# Altium PCB BeagleBone_Black_RevB4_V2.PcbDoc (part 3 of 3)
Units mm, origin at the board's own origin, x right, y up, seen from the top; angles counter-clockwise.
Board outline 100 x 100 mm, 2 copper layers (Top Layer, Bottom Layer); 274 components, 245 nets, 1313 pads, 251 vias.
Unrouted connection lines stored in the file: 891.
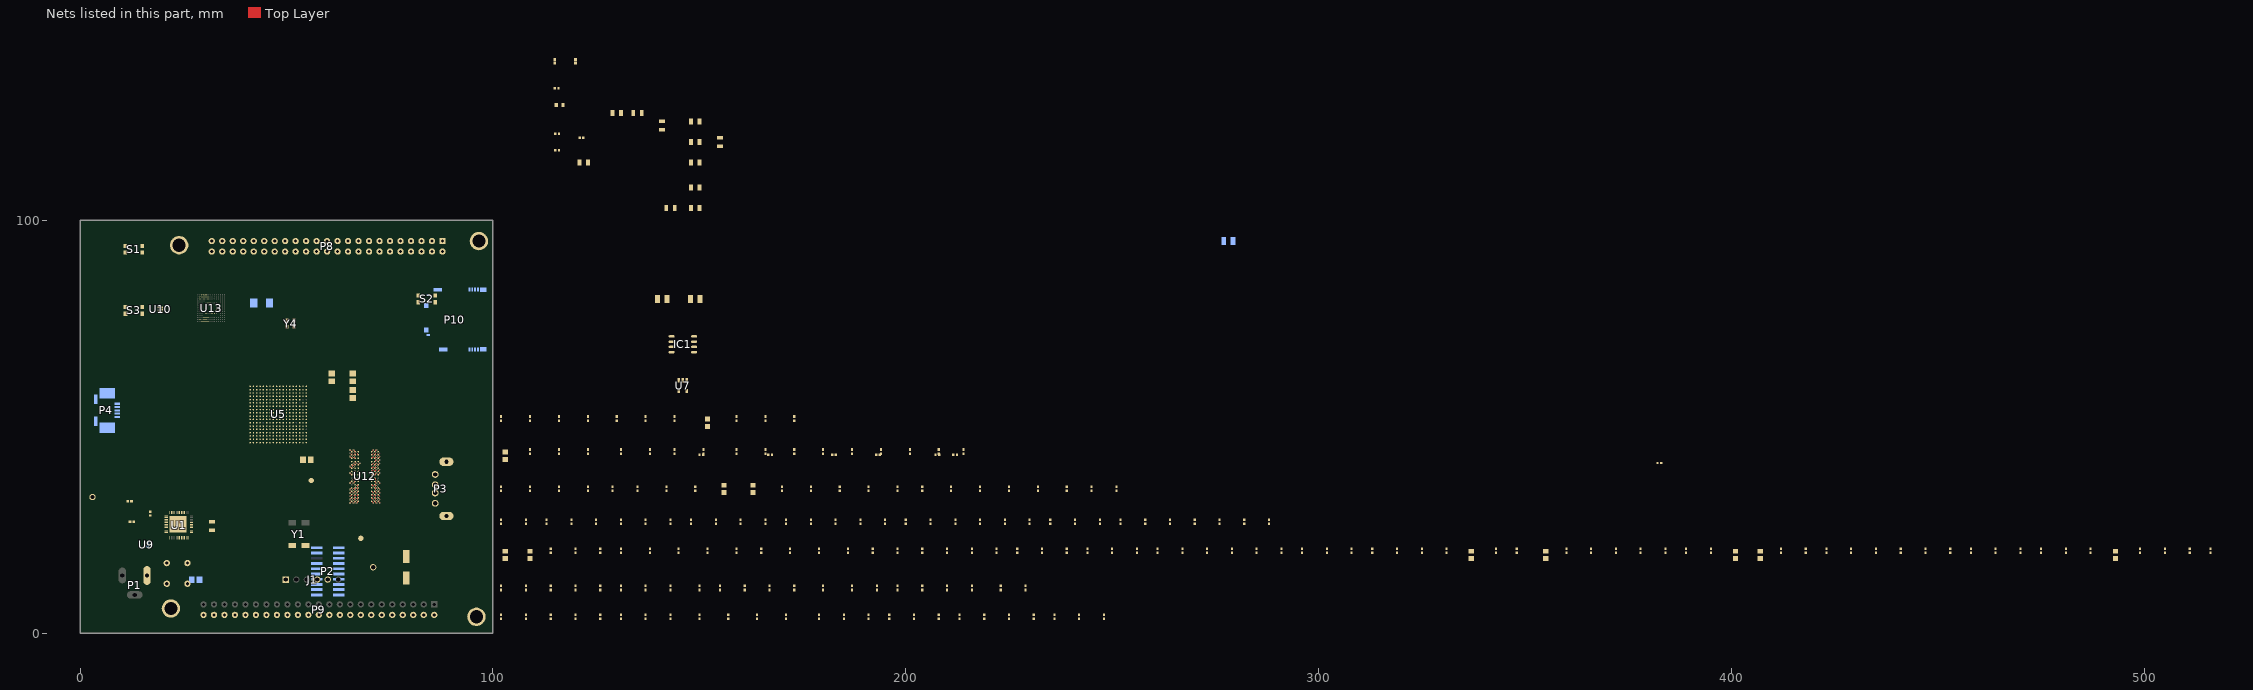
[diagram p2: the nets of this part, all layers, seen from the top]

## Part data (continued)
Y2: library part CRYS_24MHz_SCC, "CRYSTAL 24.000MHZ 18PF SMD", ESR (Equivalent Series Resistance)="50 Ohm", Frequency Stability=±30ppm, Load Capacitance=18pF, Manufacturer="TXC CORPORATION", Manufacturer Part Number=7A-24.000MAAJ-T, Operating Mode=Fundamental, Operating Temperature="-20°C ~ 70°C", Package / Case=2-SMD, Ratings=-, Supplier Part Number 1=887-1090-6-ND, Category="Crystals and Oscillators", ComponentLink1Description=http://www.txccrystal.com/images/pdf/7a.pdf, ComponentLink1URL=http://www.txccrystal.com/images/pdf/7a.pdf, Frequency=24MHz, Frequency Tolerance=±30ppm, Height="0.053\" (1.35mm)", Mounting Type="Surface Mount", Packaging=Digi-Reel®, Pricing 1="1=0.79, 10=0.658, 50=0.59, 100=0.525, 500=0.5 (USD)", RoHS="RoHS Compliant", Size / Dimension="0.197\" L x 0.126\" W (5.00mm x 3.20mm)", Stock 1=2524, Supplier 1=Digi-Key, Type="MHz Crystal"
Y4: library part ASDMB, Current - Supply (Disable) (Max)=15µA, Current - Supply (Max)=16mA, Frequency Stability=±50ppm, Manufacturer="Abracon Corporation", Manufacturer Part Number=ASDMB-24.576MHZ-LC-T, Operating Temperature="-40°C ~ 85°C", Package / Case="4-SMD, No Lead (DFN, LCC)", Ratings=-, Supplier Part Number 1=535-11729-6-ND, Voltage - Supply="1.8 V ~ 3.3 V", Category="Crystals and Oscillators", ComponentLink1Description=http://www.abracon.com/Oscillators/ASDMB.pdf, ComponentLink1URL=http://www.abracon.com/Oscillators/ASDMB.pdf, Frequency=24.576MHz, Function="Standby (Power Down)", Height="0.035\" (0.90mm)", Mounting Type="Surface Mount", Output=CMOS, Packaging=Digi-Reel®, Pricing 1="1=1.69, 10=1.463, 50=1.2826, 100=1.0125, 500=0.855 (USD)", RoHS="RoHS Compliant", Size / Dimension="0.098\" L x 0.079\" W (2.50mm x 2.00mm)", Stock 1=0, Supplier 1=Digi-Key, Type="MEMS (Silicon)"

## Via types
v1: diameter 0.457, hole 0.203, Top Layer to Bottom Layer, tented both sides, 251 vias

## Nets (pads, with @x,y where several pads share a name; then routed paths per layer and width w, separated by ;. In a path a pad name is that pad's centre, name@x,y a point inside that pad or via, vN(x,y) a via of type N, cw(c..) or ccw(c..) an arc to the next point about the centre after c; other vN are vias at no path point)
12M_LOOP: 
12MHZ: R21.2
AIN0: C1.2 C2.2 C3.2 C4.2 C5.1 C6.1 C7.2 C8.2 C9.1 C10.2 C11.1 C12.2 C13.1 C14.1 C15.1 C16.2 C18.2 C24.2 C27.2 C28.2 C29.2 C30.2 C31.2 C32.2 C33.2 C34.2 C35.2 C36.2 C37.2 C38.2 C39.1 C40.1 C41.2 C42.2 C43.2 C44.2 C45.2 C46.2 C47.2 C48.2 C49.2 C50.2 C51.2 C52.2 C53.2 C54.2 C55.1 C56.1 C57.1 C58.2 C59.2 C60.1 C61.1 C62.1 C63.2 C64.2 C65.2 C66.2 C67.2 C68.1 C69.1 C70.1 C71.1 C72.1 C73.1 C74.1 C75.1 C76.1 C77.2 C78.2 C79.2 C80.2 C81.2 C82.2 C83.2 C84.2 C85.2 C86.2 C87.2 C88.2 C89.2 C90.2 C91.2 C92.2 C93.2 C94.2 C95.1 C96.1 C97.2 C98.2 C99.2 C100.2 C101.2 C102.2 C103.2 C104.2 C105.2 C106.2 C107.2 C108.2 C109.2 C110.2 C111.2 C112.2 C113.2 C114.2 C115.2 C116.2 C117.2 C118.1 C119.2 C120.2 C121.2 C122.1 C123.2 C124.2 C125.2 C126.1 C127.2 C128.2 C129.2 C130.2 C152.2 C153.2 C154.2 C155.1 C158.2 C159.2 FB3.1 FB3.2 IC1.5 IC1.6 IC1.7 IC1.8 J1.1 P2.4 P2.8 P2.10 P2.12 P2.16 P2.20 P3.4 P4.5 P8.1 P8.2 P9.2 P9.30 P9.34 P9.38 P9.40 P9.44 P9.46 P10.6 P10.9 R9.2 R10.1 R22.1 R25.2 R49.1 R53.2 R54.1 R80.2 R81.2 R82.2 R83.2 R84.2 R85.2 R86.2 R87.2 R88.2 R89.2 R90.2 R91.2 R92.2 R93.2 R94.2 R95.2 R96.1 R99.1 R100.2 R164.2 R165.2 S1.1 S1.3 S2.2 S2.4 S3.1 S3.3 TP1.1 TP8.1 U1.30 U1.41 U1.49 U5.A1 U5.A7 U5.A8 U5.A9 U5.A18 U5.B6 U5.B7 U5.B13 U5.C7 U5.C8 U5.D12 U5.E8 U5.F8 U5.G8 U5.G9 U5.G11 U5.G12 U5.H6 U5.H7 U5.H8 U5.H9 U5.H10 U5.H12 U5.J6 U5.J7 U5.J8 U5.J9 U5.J10 U5.J11 U5.K7 U5.K9 U5.K10 U5.K11 U5.L10 U5.L11 U5.L12 U5.L13 U5.M6 U5.M7 U5.M8 U5.M9 U5.M10 U5.M12 U5.M14 U5.N7 U5.N10 U5.N11 U5.N14 U5.V1 U5.V18 U7.2 U9.4 U10.4 U12.A9 U12.B1 U12.B3 U12.B9 U12.D1 U12.D8 U12.E1 U12.E2 U12.E8 U12.F9 U12.G1 U12.G8 U12.G9 U12.J2 U12.J8 U12.M1 U12.M9 U12.P1 U12.P9 U12.T1 U12.T9 U13.C4 U13.E7 U13.G5 U13.H10 U13.K8 U13.N2 U13.N5 U13.P4 U13.P6 Y4.2
  other v1: 65.4,31.599 72.6,31.599 65.4,33.199 72.6,33.199 65.4,34.8 72.6,34.8 66.2,37.2 71.8,37.2 71.8,39.6 72.6,39.6 66.2,40.4 66.2,41.2 71.8,41.2 71.8,42.001 65.4,43.601 67,43.601 72.6,43.601
AIN5: P9.36 U5.B8
AIN7: R163.2 R164.1 U5.C9
B_UART0_RX: J1.4 R165.1
B_UART0_TX: J1.5
CAP_VBB_MPU: C91.1 U5.C10
CAP_VDD_SRAM_CORE: C89.1 U5.D9
CAP_VDD_SRAM_MPU: C90.1 U5.D11
CLKOUT2: P2.18 P9.42 R2.1 R3.1 R19.2 R20.1 R50.1 R51.1 U1.27 U1.28 U5.C16 U5.C17 U7.1 U7.3
CLKOUT_SRC: R19.1 U5.D14
DDR_A0: U5.F3 U12.N3
  other v1: 67,34
DDR_A1: U5.H1 U12.P7
  other v1: 71,33.199
DDR_A2: U5.E4 U12.P3
  other v1: 67,33.199
DDR_A3: U5.C3 U12.N2
  other v1: 66.2,34
DDR_A4: U5.C2 U12.P8
  other v1: 71.8,33.199
DDR_A5: U5.B1 U12.P2
  other v1: 66.2,33.199
DDR_A6: U5.D5 U12.R8
  other v1: 71.8,32.399
DDR_A7: U5.E2 U12.R2
  other v1: 66.2,32.399
DDR_A8: U5.D4 U12.T8
  other v1: 71.8,31.599
DDR_A9: U5.C1 U12.R3
  other v1: 67,32.399
DDR_A10: U5.F4 U12.L7
  other v1: 71,35.6
DDR_A11: U5.F2 U12.R7
  other v1: 71,32.399
DDR_A12: U5.E3 U12.N7
  other v1: 71,34
DDR_A13: U5.H3 U12.T3
  other v1: 67,31.599
DDR_A14: U5.H4 U12.T7
  other v1: 71,31.599
DDR_A15: U5.D3 U12.M7
DDR_BA0: U5.C4 U12.M2
  other v1: 66.2,34.8
DDR_BA1: U5.E1 U12.N8
  other v1: 71.8,34
DDR_BA2: U5.B3 U12.M3
  other v1: 67,34.8
DDR_CASn: U5.F1 U12.K3
DDR_CKE: R96.2 U5.G3 U12.K9
  other v1: 72.6,36.4
DDR_CLK: U5.D2 U12.J7
DDR_CLKn: U5.D1 U12.K7
DDR_CSn: U5.H2 U12.L2
DDR_D0: U5.M3 U12.E3
  other v1: 67.8,41.2
DDR_D1: U5.M4 U12.F7
  other v1: 71,40.4
DDR_D2: U5.N1 U12.F2
DDR_D3: U5.N2 U12.F8
  other v1: 71.8,40.4
DDR_D4: U5.N3 U12.H3
DDR_D5: U5.N4 U12.H8
  other v1: 71.8,38.8
DDR_D6: U5.P3 U12.G2
DDR_D7: U5.P4 U12.H7
  other v1: 71,38.8
DDR_D8: U5.J1 U12.D7
DDR_D9: U5.K1 U12.C3
DDR_D10: U5.K2 U12.C8
  other v1: 71.8,42.801
DDR_D11: U5.K3 U12.C2
  other v1: 66.2,42.801
DDR_D12: U5.K4 U12.A7
  other v1: 71,44.401
DDR_D13: U5.L3 U12.A2
  other v1: 66.2,44.401
DDR_D14: U5.L4 U12.B8
  other v1: 71.8,43.601
DDR_D15: U5.M1 U12.A3
DDR_DQM0: U5.M2 U12.E7
  other v1: 71,41.2
DDR_DQM1: U5.J2 U12.D3
DDR_DQS0: U5.P1 U12.F3
DDR_DQS1: U5.L1 U12.C7
  other v1: 71,42.801
DDR_DQSN0: U5.P2 U12.G3
DDR_DQSN1: U5.L2 U12.B7
  other v1: 71,43.601
DDR_ODT: U5.G1 U12.K1
  other v1: 65.4,36.4
DDR_RASn: U5.G4 U12.J3
  other v1: 67,37.2
DDR_RESETn: R97.2 U5.G2 U12.T2
  other v1: 66.2,31.599
DDR_VREF: C28.1 C123.1 C124.1 R98.2 R100.1 U5.J4 U12.H1 U12.M8
  other v1: 71.8,34.8 65.4,38.8
DDR_VTP: R22.2 U5.J3
DDR_WEn: U5.B2 U12.L3
  other v1: 67,35.6
EHRPWM1A: P9.14 U5.U14 U5.U17
EHRPWM1B: P9.12 P9.16 R160.2 R161.2 U5.T14 U5.T17 U5.U18
EHRPWM2A: P8.19 U5.U10
EHRPWM2B: P8.13 U5.T10
eMMC_RSTn: R111.2 R162.2 U13.K5
eMMC_VCCI: C125.1 U13.C2
ENZ_KALDO_1P8V: R54.2 U5.B4
GND_EARTH: MTG1.1 MTG2.1 MTG3.1 MTG4.1 P3.5 P3.6 P4.6 P4.7 P4.8 P4.9 P10.11 P10.12 P10.13 P10.14 P10.15 P10.16
GND_OSC0: C25.2 C26.2 U5.V11
GND_OSC1: C21.1 C22.1 U5.A5
GPIO0_7SRC: R50.2 U5.C18
GPIO0_26: P8.14 U5.T11
GPIO0_27: P8.17 U5.U12
GPIO1_12: P8.12 U5.T12
GPIO1_13: P8.11 U5.R12
GPIO1_14: P8.16 U5.V13
GPIO1_15: P8.15 U5.U13
GPIO1_17: P9.24 U5.D15 U5.V14
GPIO1_29: P8.26 U5.V6
GPIO2_1: P8.18 U5.V12
GPIO3_18: R51.2 U5.B12
GPIO3_19: P9.28 U5.C12 U5.C13
GPIO3_20: R20.2 U5.D13
GPIO3_21: P9.26 R167.2 U5.A14 U5.D16
HDMI_INT: U5.U16
HDMICLK_DISn: U5.V17 Y4.1
I2C1_SCL: C24.1 C30.1 P2.15 P9.10 P9.18 R14.2 S1.2 S1.4 U1.25 U5.A10 U5.A16 U5.B16
I2C2_SCL: P9.20 U5.D17 U5.D18
JTAG_EMU0: P2.13 R23.2 U5.C14
JTAG_EMU1: P2.14 R24.2 U5.B14
JTAG_TCK: P2.9 P2.11 U5.A12
JTAG_TDI: P2.3 U5.B11
JTAG_TDO: P2.7 U5.A11
JTAG_TMS: P2.1 U5.C11
JTAG_TRSTn: P2.2 R25.1 U5.B10
LCD_DATA0: P8.45 R70.2 R95.1 U5.R1
LCD_DATA1: P8.46 R69.2 R94.1 U5.R2
LCD_DATA2: P8.43 R68.2 R75.1 R93.1 U5.R3
LCD_DATA3: P8.44 R67.2 R92.1 U5.R4
LCD_DATA4: P8.41 R66.2 R91.1 U5.T1
LCD_DATA5: P8.42 R65.2 R90.1 U5.T2
LCD_DATA6: P8.39 R64.2 R89.1 U5.T3
LCD_DATA7: P8.40 R63.2 R88.1 U5.T4
LCD_DATA8: P8.37 R62.2 R87.1 U5.U1
LCD_DATA9: P8.38 R61.2 R86.1 U5.U2
LCD_DATA10: P8.36 R60.2 R85.1 U5.U3
LCD_DATA11: P8.34 R59.2 R84.1 U5.U4
LCD_DATA12: P8.35 R58.2 R83.1 U5.V2
LCD_DATA13: P8.33 R57.2 R82.1 U5.V3
LCD_DATA14: P8.31 R56.2 R81.1 U5.V4
LCD_DATA15: P8.32 R55.2 R80.1 U5.T5
LCD_DE: P8.30 R48.2
LCD_HSYNC: P8.29 R47.2
LCD_PCLK: P8.28 R45.2
LCD_VSYNC: P8.27 R46.2
LCDDE: R48.1 U5.R6
LCDPCLK: R45.1 U5.V5
LCDVHYNC: R47.1 U5.R5
LCDVSYNC: R46.1 U5.U5
LDO_PGOOD: U1.46 U5.B5
MDIO_CLK: U5.M18
MDIO_DATA: U5.M17
MII1_COL: U5.H16
MII1_CRS_DV: U5.H17
MII1_REFCLK: R28.2
MII1_RXCLK: U5.L18
MII1_RXD0: U5.M16
MII1_RXD1: U5.L15
MII1_RXD2: U5.L16
MII1_RXD3: U5.L17
MII1_RXDV: U5.J17
MII1_RXERR: U5.J15
MII1_TXCLK: U5.K18
MII1_TXD0: U5.K17
MII1_TXD1: U5.K16
MII1_TXD2: U5.K15
MII1_TXD3: U5.J18
MII1_TXEN: U5.J16
MMC0_CD: P2.19 P10.10 R157.1 U5.C15
MMC0_CLKO: P10.5 R152.2 U5.G17
MMC0_CMD: P10.3 R151.2 U5.G18
MMC0_DAT0: P10.7 R153.2 U5.G16
MMC0_DAT1: P10.8 R154.2 U5.G15
MMC0_DAT2: P10.1 R150.2 U5.F18
MMC0_DAT3: P10.2 R155.2 U5.F17
MMC1_CLK: P8.21 R110.2 U5.U9 U13.M6
MMC1_CMD: P8.20 R109.2 U5.V9 U13.M5
MMC1_DAT0: P8.25 R101.2 U5.U7 U13.A3
MMC1_DAT1: P8.24 R102.2 U5.V7 U13.A4
MMC1_DAT2: P8.5 R103.2 U5.R8 U13.A5
MMC1_DAT3: P8.6 R104.2 U5.T8 U13.B2
MMC1_DAT4: P8.23 R105.2 U5.U8 U13.B3
MMC1_DAT5: P8.22 R106.2 U5.V8 U13.B4
MMC1_DAT6: P8.3 R107.2 U5.R9 U13.B5
MMC1_DAT7: P8.4 R108.2 U5.T9 U13.B6
NetC17_1: IC1.4 R10.2 R11.1
NetR21_1: R21.1
NetR75_2: R75.2 S2.1 S2.3
NetR159_2: R159.2 U5.P15
NetR162_1: R162.1
NetR167_1: R167.1 Y4.3
NetTP5_1: TP5.1 U1.4 U1.5
NetTP6_1: TP6.1 U1.6
NetTP7_1: TP7.1 U1.11
NetU3_2: U5.R14
OSC0_IN: C25.1 R17.1 U5.V10 Y2.2
OSC0_OUT: C26.1 R17.2 U5.U11 Y2.1
OSC1_IN: C21.2 U5.A6 Y1.1
OSC1_OUT: C22.2 U5.A4 Y1.4
P_BYPASS: C4.1 U1.47
P_INT_LDO: C3.1 U1.48
P_L1: L1.1 U1.20
P_L2: L2.1 U1.23
P_L3: L3.1 U1.31
PMIC_INT: R1.1 U1.45 U5.B18
PMIC_PGOOD: U1.26 U5.B15
PMIC_POWR_EN: U1.9 U5.C6
PROC_A15: R18.1 U5.A15
PWR_BUT: S3.2 S3.4
PWR_LEDR: D1.1 R9.1
SPI1_SCLK: C93.1 FB2.1 P9.32 R27.1 U5.A13 U5.D8
SYS_5V: C34.1 P9.8
SYS_5V_err: C7.1 C8.1 C10.1 C12.1 C16.1 IC1.2 U1.2 U1.7 U1.8 U1.21 U1.22 U1.32 U1.39 U1.42
TESTOUT: TP3.1 U5.A3
TIMER4: P8.7 U5.R7
TIMER5: P8.9 U5.T6
TIMER6: P8.10 U5.U6
TIMER7: P8.8 U5.T7
U5_H18: R28.1 U5.H18
U5_R13: R160.1 U5.R13
U5_T13: R161.1 U5.T13
UART0_RX: U5.E15
UART0_TX: U5.E16
UART2_RXD: P9.22 U5.A17 U5.B17
USB0_DM: P4.2 U5.N18 U10.2
USB0_DP: P4.3 U5.N17 U10.1
USB0_ID: P4.4 U5.P16 U10.3
USB1_DM: P3.2 U5.R18 U9.2
USB1_DP: P3.3 U5.R17 U9.1
USB1_DRVVBUS: R53.1 U5.F15
USB1_ID: R49.2 U5.P17
USB1_OCn: R52.2 U5.T16
USB1_PWR: C35.1 FB7.1 FB8.2 U9.6
USB1_VBUS: FB8.1 U5.T18
USB_DC: C36.1 P4.1 R159.1 U10.6
USB_DC_err: C2.1 U1.12
USR0: U5.V15
USR1: U5.U15
USR2: U5.T15
USR3: U5.V16
VBUS: FB7.2 P3.1
VDCDC1: L1.2 R4.1 U1.19
VDCDC2: C6.2 L2.2 U1.24
VDCDC3: C9.2 L3.2 U1.29
VDD_1V8: C78.1 C86.1 C88.1 FB1.1 FB2.2 U5.D10 U5.E9 U5.N16 U5.R16
VDD_1V8_err: C11.2 R5.1 U1.40
VDD_3V3A: C27.1 C37.1 C38.1 C56.2 C57.2 C58.1 C59.1 C60.2 C61.2 C66.1 C67.1 C68.2 C69.2 C70.2 C71.2 C72.2 C73.2 C74.2 C75.2 C76.2 C77.1 C87.1 C152.1 C158.1 C159.1 R14.1 R52.1 R55.1 R56.1 R57.1 R58.1 R59.1 R60.1 R61.1 R62.1 R63.1 R64.1 R65.1 R66.1 R67.1 R68.1 R69.1 R70.1 R156.1 U5.E10 U5.E11 U5.E12 U5.E13 U5.F14 U5.G14 U5.H14 U5.J14 U5.K14 U5.L14 U5.N5 U5.N15 U5.P5 U5.P6 U5.P7 U5.P8 U5.P10 U5.P11 U5.P12 U5.P13 U5.R15 U7.4 Y4.4
VDD_3V3A_err: C13.2 R1.2 R2.2 R3.2 U1.43
VDD_3V3AUX: C15.2 D1.2 IC1.1 U1.1
VDD_3V3B: C29.1 C126.2 C127.1 C128.1 C129.1 C130.1 C153.1 C154.1 C155.2 P2.5 P9.4 P10.4 R23.1 R24.1 R101.1 R102.1 R103.1 R104.1 R105.1 R106.1 R107.1 R108.1 R109.1 R110.1 R111.1 R150.1 R151.1 R152.1 R153.1 R154.1 R155.1 R157.2 R163.1 U13.C6 U13.E6 U13.F5 U13.J10 U13.K9 U13.M4 U13.N4 U13.P3 U13.P5
VDD_3V3B_err: C18.1 IC1.3 R11.2
VDD_5V: P9.6
VDD_5V_err: C1.1 P1.1 U1.10
VDD_CORE: C39.2 C40.2 C41.1 C42.1 C43.1 C44.1 C45.1 C46.1 C47.1 C48.1 C49.1 C50.1 C51.1 C52.1 C53.1 C54.1 C55.2 U5.F6 U5.F7 U5.G6 U5.G7 U5.G10 U5.H11 U5.J12 U5.K6 U5.K8 U5.K12 U5.L6 U5.L7 U5.L8 U5.L9 U5.M11 U5.M13 U5.N8 U5.N9 U5.N12 U5.N13
VDD_MPU: C62.2 C63.1 C64.1 C65.1 U5.F10 U5.F11 U5.F12 U5.F13 U5.G13 U5.H13 U5.J13
VDD_MPUON: TP2.1 U5.A2
VDD_PLL: C79.1 C92.1 C94.1 C106.1 FB1.2 U5.E7 U5.H15 U5.R10 U5.R11
VDD_RTC: C104.1 U5.D6
VDDS: C80.1 C81.1 C82.1 C83.1 C84.1 C85.1 U5.E6 U5.E14 U5.F9 U5.K13 U5.N6 U5.P9 U5.P14
VDDS_DDR: C95.2 C96.2 C97.1 C98.1 C99.1 C100.1 C101.1 C102.1 C103.1 C107.1 C108.1 C109.1 C110.1 C111.1 C112.1 C113.1 C114.1 C115.1 C116.1 C117.1 C118.2 C119.1 C120.1 C121.1 C122.2 R97.1 R98.1 U5.E5 U5.F5 U5.G5 U5.H5 U5.J5 U5.K5 U5.L5 U12.A1 U12.A8 U12.B2 U12.C1 U12.C9 U12.D2 U12.D9 U12.E9 U12.F1 U12.G7 U12.H2 U12.H9 U12.K2 U12.K8 U12.N1 U12.N9 U12.R1 U12.R9
  other v1: 65.4,32.399 72.6,32.399 65.4,34 72.6,34 66.2,36.4 71.8,36.4 66.2,38.8 72.6,38.8 71,39.6 65.4,40.4 67,41.2 72.6,41.2 72.6,42.001 65.4,42.801 72.6,42.801 66.2,43.601 65.4,44.401 71.8,44.401
VDDS_DDR_err: C5.2 R4.2
VDDS_err: R5.2 R8.2
VIO: R6.2 U1.18
VLDO1: R6.1 R7.1 R8.1 U1.3
VREFP_ADC: C31.1 C32.1 C33.1 R27.2 U5.B9
VRTC: C105.1 R26.1 U5.D7
VRTC_err: C14.2 R7.2
WAKEUP: R26.2 U1.13 U5.C5
WP: R156.2 TP4.1 U7.5
XDMA_EVENT_INTR0: P2.17 R18.2
ZQ: R99.2 U12.L8
  other v1: 71.8,35.6
pads on no net: J1.2 J1.3 J1.6 P1.2 P1.3 P2.6 P9.1 P9.3 P9.5 P9.7 P9.9 P9.11 P9.13 P9.15 P9.17 P9.19 P9.21 P9.23 P9.25 P9.27 P9.29 P9.31 P9.33 P9.35 P9.37 P9.39 P9.41 P9.43 P9.45 U1.14 U1.15 U1.16 U1.17 U1.33 U1.34 U1.35 U1.36 U1.37 U1.38 U1.44 U5.E17 U5.E18 U5.F16 U5.M5 U5.M15 U5.P18 U9.3 U9.5 U10.5 U12.J1 U12.J9 U12.L1 U12.L9 U13.A1 U13.A2 U13.A6 U13.A7 U13.A8 U13.A9 U13.A10 U13.A11 U13.A12 U13.A13 U13.A14 U13.B1 U13.B7 U13.B8 U13.B9 U13.B10 U13.B11 U13.B12 U13.B13 U13.B14 U13.C1 U13.C3 U13.C5 U13.C7 U13.C8 U13.C9 U13.C10 U13.C11 U13.C12 U13.C13 U13.C14 U13.D1 U13.D2 U13.D3 U13.D4 U13.D12 U13.D13 U13.D14 U13.E1 U13.E2 U13.E3 U13.E5 U13.E8 U13.E9 U13.E10 U13.E12 U13.E13 U13.E14 U13.F1 U13.F2 U13.F3 U13.F10 U13.F12 U13.F13 U13.F14 U13.G1 U13.G2 U13.G3 U13.G10 U13.G12 U13.G13 U13.G14 U13.H1 U13.H2 U13.H3 U13.H5 U13.H12 U13.H13 U13.H14 U13.J1 U13.J2 U13.J3 U13.J5 U13.J12 U13.J13 U13.J14 U13.K1 U13.K2 U13.K3 U13.K6 U13.K7 U13.K10 U13.K12 U13.K13 U13.K14 U13.L1 U13.L2 U13.L3 U13.L12 U13.L13 U13.L14 U13.M1 U13.M2 U13.M3 U13.M7 U13.M8 U13.M9 U13.M10 U13.M11 U13.M12 U13.M13 U13.M14 U13.N1 U13.N3 U13.N6 U13.N7 U13.N8 U13.N9 U13.N10 U13.N11 U13.N12 U13.N13 U13.N14 U13.P1 U13.P2 U13.P7 U13.P8 U13.P9 U13.P10 U13.P11 U13.P12 U13.P13 U13.P14 Y1.2 Y1.3
copper on no net:
  other v1: 40.8,45.8 42.4,45.8 43.2,45.8 44.8,45.8 42.4,46.6 43.2,46.6 44.8,46.6 52,46.6 52.8,46.6 53.6,46.6 42.4,47.4 43.2,47.4 44,47.4 44.8,47.4 45.6,47.4 46.4,47.4 47.2,47.4 48.8,47.4 49.6,47.4 50.4,47.4 51.2,47.4 52,47.4 52.8,47.4 53.6,47.4 42.4,48.2 43.2,48.2 44,48.2 44.8,48.2 45.6,48.2 46.4,48.2 47.2,48.2 48.8,48.2 49.6,48.2 50.4,48.2 51.2,48.2 52,48.2 52.8,48.2 42.4,49 43.2,49 44,49 44.8,49 45.6,49 46.4,49 47.2,49 49.6,49 50.4,49 51.2,49 52,49 52.8,49 53.6,49 42.4,49.8 43.2,49.8 45.6,49.8 47.2,49.8 48.8,49.8 50.4,49.8 52.8,49.8 53.6,49.8 41.6,50.6 42.4,50.6 43.2,50.6 44,50.6 44.8,50.6 45.6,50.6 48.8,50.6 50.4,50.6 51.2,50.6 52,50.6 52.8,50.6 53.6,50.6 42.4,51.4 43.2,51.4 45.6,51.4 46.4,51.4 47.2,51.4 48.8,51.4 49.6,51.4 50.4,51.4 52.8,51.4 53.6,51.4 42.4,52.2 44,52.2 44.8,52.2 45.6,52.2 46.4,52.2 47.2,52.2 48.8,52.2 49.6,52.2 50.4,52.2 51.2,52.2 52,52.2 52.8,52.2 53.6,52.2 48,53 42.4,53.8 43.2,53.8 44,53.8 44.8,53.8 45.6,53.8 46.4,53.8 47.2,53.8 48.8,53.8 49.6,53.8 51.2,53.8 52,53.8 52.8,53.8 53.6,53.8 42.4,54.6 43.2,54.6 45.6,54.6 46.4,54.6 47.2,54.6 48.8,54.6 49.6,54.6 50.4,54.6 52.8,54.6 53.6,54.6 55.2,54.6 40.8,55.4 41.6,55.4 44,55.4 44.8,55.4 45.6,55.4 47.2,55.4 48.8,55.4 50.4,55.4 52,55.4 52.8,55.4 53.6,55.4 42.4,56.2 43.2,56.2 47.2,56.2 48.8,56.2 50.4,56.2 52.8,56.2 53.6,56.2 41.6,57 42.4,57 43.2,57 44,57 44.8,57 45.6,57 46.4,57 47.2,57 48.8,57 50.4,57 51.2,57 52,57 52.8,57 53.6,57 42.4,57.8 43.2,57.8 44,57.8 44.8,57.8 45.6,57.8 47.2,57.8 48.8,57.8 49.6,57.8 50.4,57.8 51.2,57.8 52,57.8 52.8,57.8 53.6,57.8 42.4,58.6 43.2,58.6 44,58.6 44.8,58.6 45.6,58.6 46.4,58.6 47.2,58.6 48.8,58.6 49.6,58.6 50.4,58.6 51.2,58.6 52,58.6 52.8,58.6 53.6,58.6

## Text inside footprints (layer, text, board x,y; h text height)
P2: Bottom Overlay "2" at 55.11,21.033 h0.71 r180; Bottom Overlay "20" at 56.634,8.46 h0.71 r90; Bottom Overlay "1" at 64.381,21.16 h0.71 r180; Bottom Overlay "19" at 65.016,9.857 h0.71 r90